# Altium PCB Encoder.PcbDoc
Units mm, origin at the board's own origin, x right, y up, seen from the top; angles counter-clockwise.
Board outline 39.12 x 39.12 mm, 4 copper layers (Top Layer, Signal Layer 2, Signal Layer 1, Bottom Layer), stack 0.778 mm thick; 30 components, 28 nets, 133 pads, 38 vias.
Unrouted connection lines stored in the file: 10.
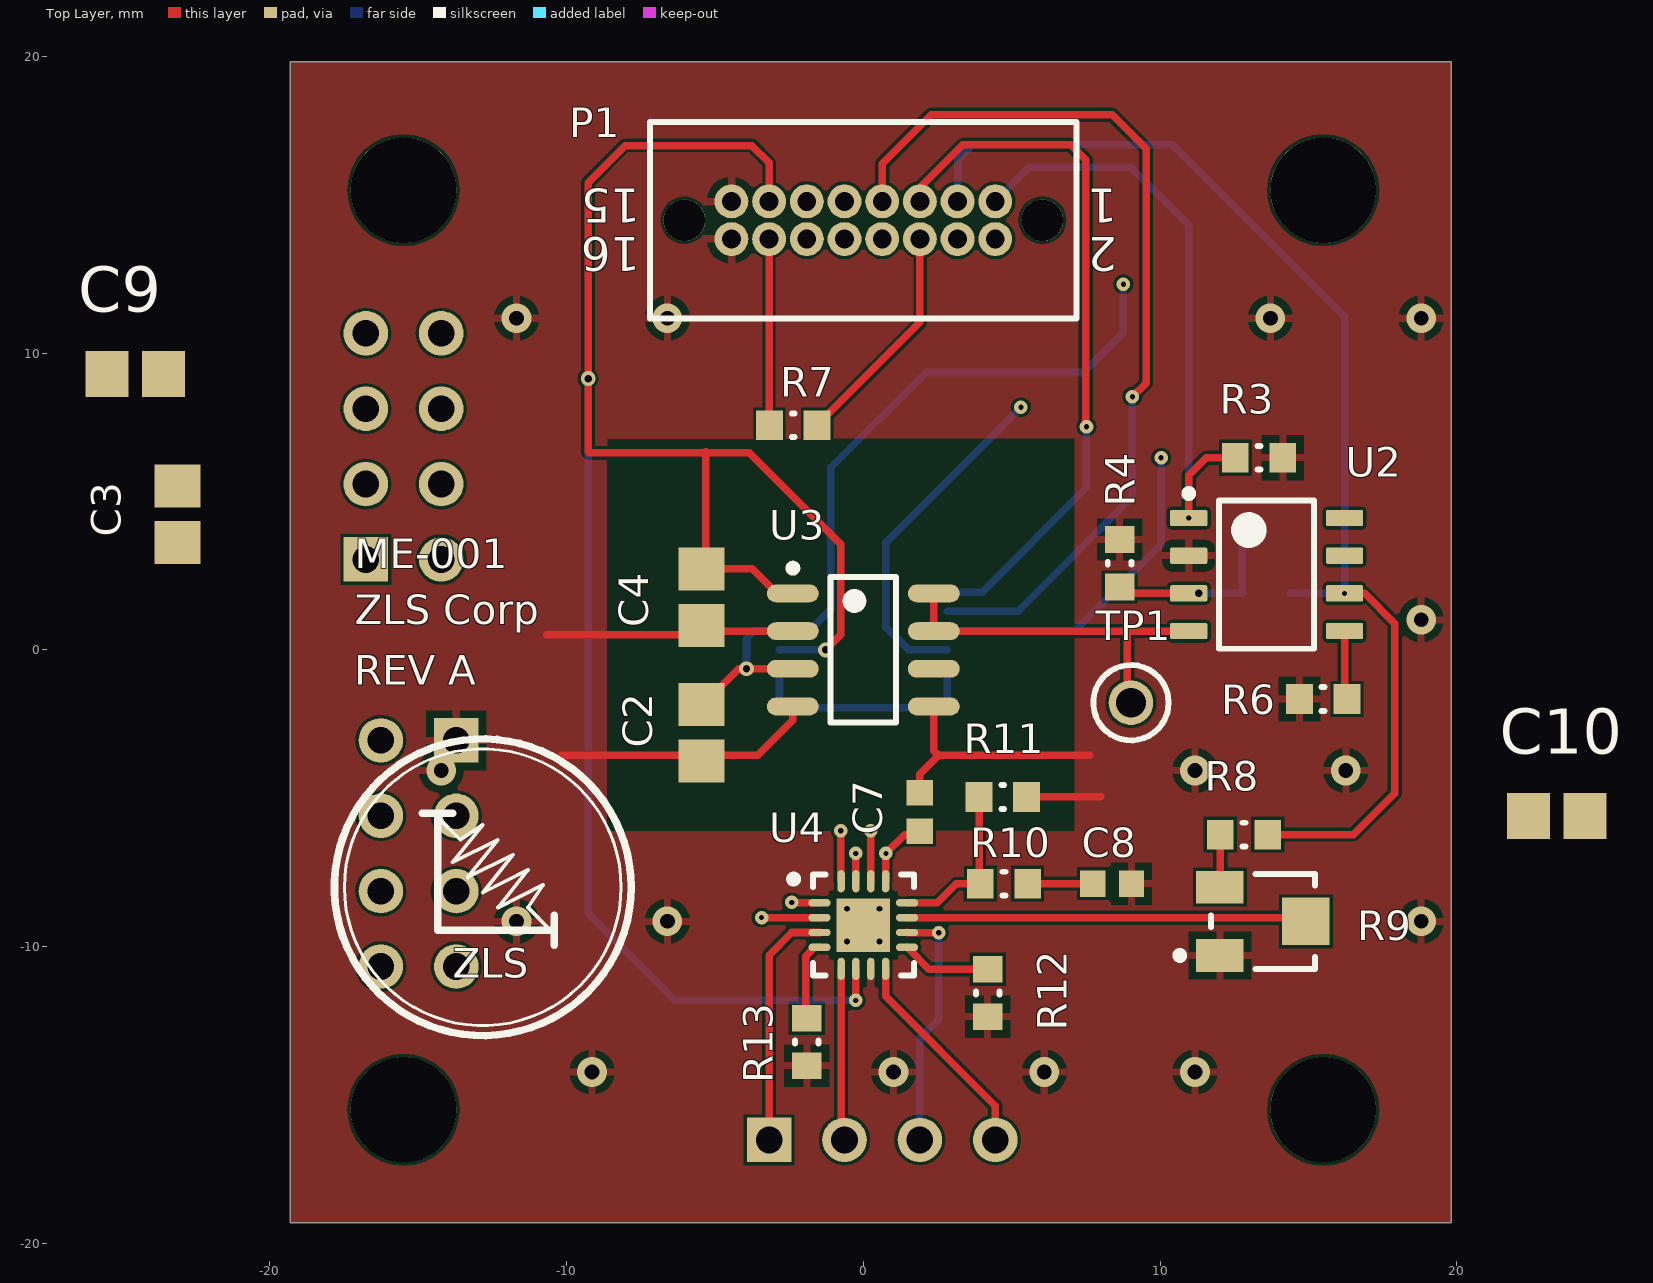
[diagram p0: Top Layer view]
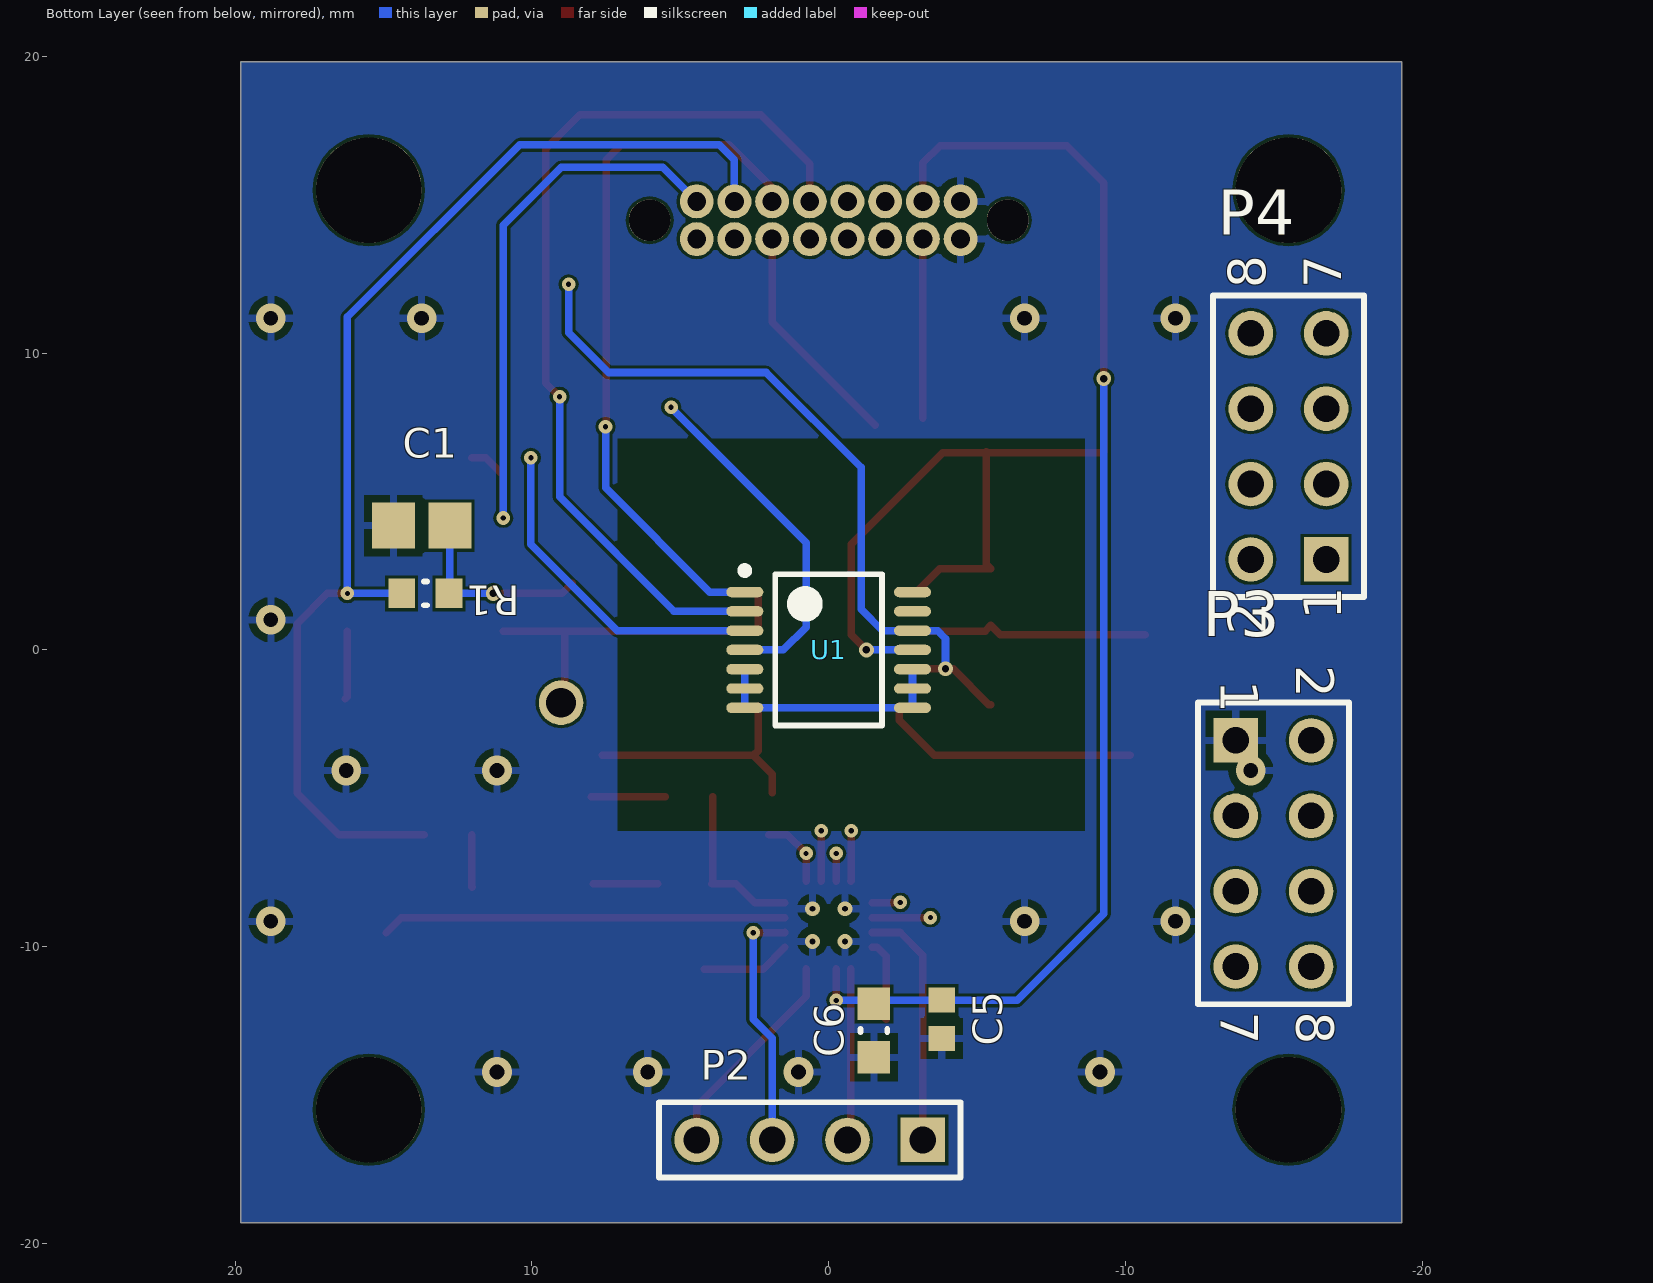
[diagram p1: Bottom Layer view, seen from below]
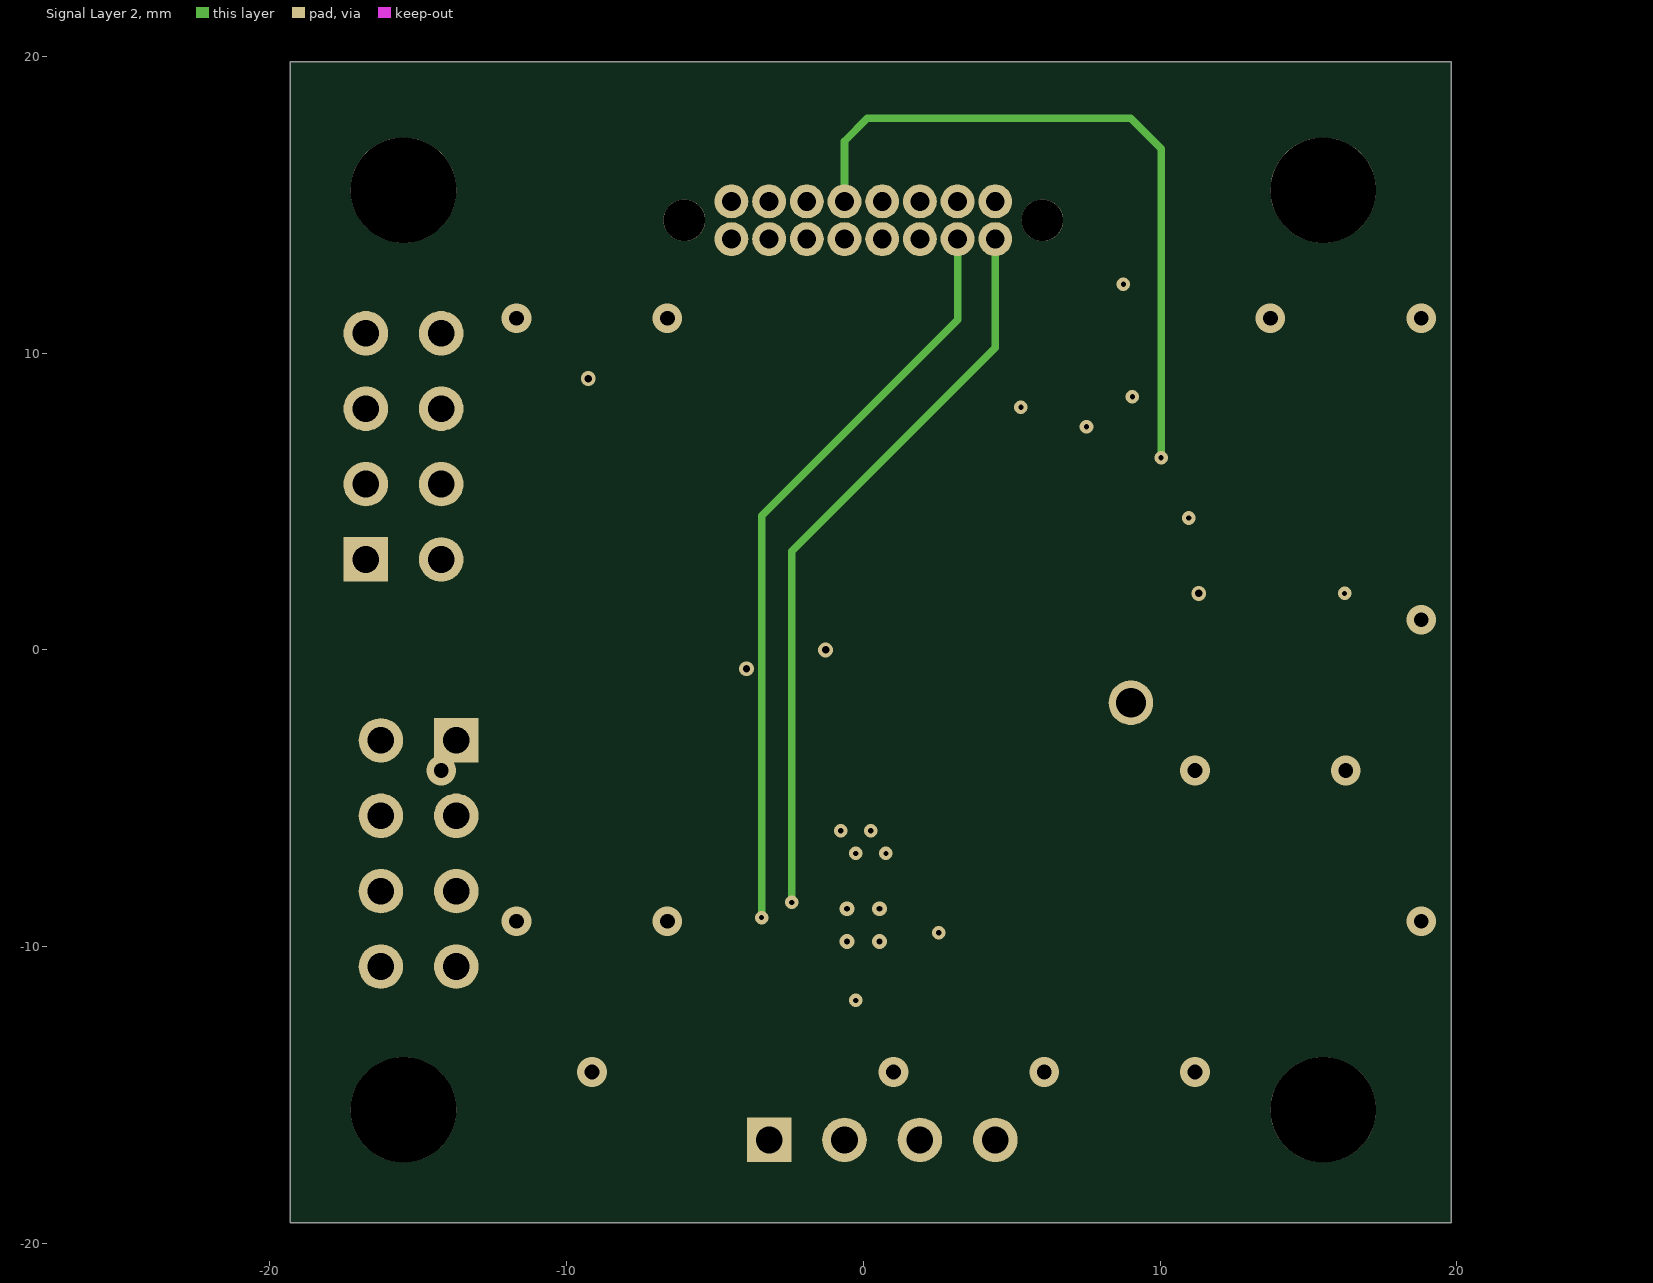
[diagram p2: Signal Layer 2]
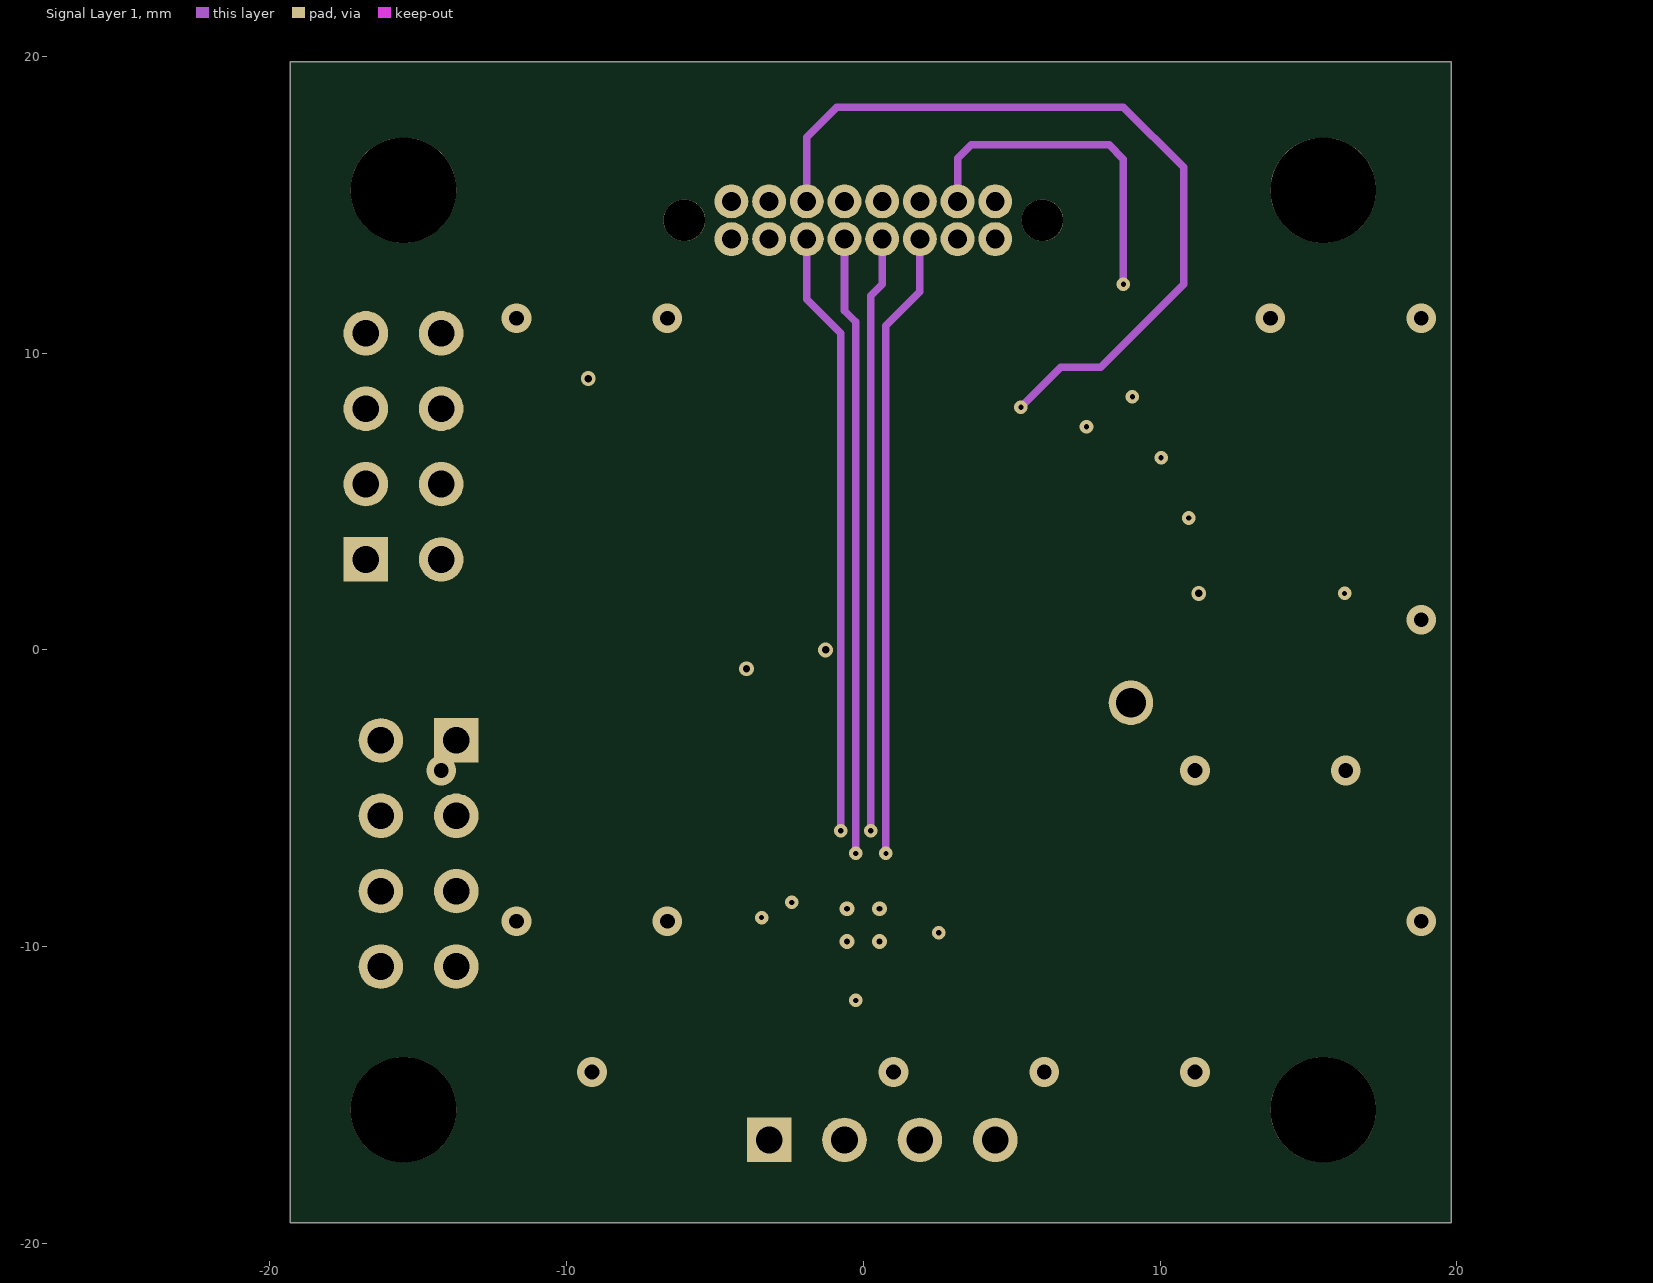
[diagram p3: Signal Layer 1]

## Layer stack, top to bottom
Top Solder: solder mask 0.0102, Solder Resist, Dk 3.5
Top Layer: signal copper 0.0356
Dielectric 1: core 0.254, FR-4, Dk 4.2
Signal Layer 2: signal copper 0.036
Dielectric 3: prepreg 0.127, Dk 4.2
Signal Layer 1: signal copper 0.036
Dielectric 2: core 0.254, Dk 4.2
Bottom Layer: signal copper 0.0356
Bottom Solder: solder mask 0.0102, Solder Resist, Dk 3.5

## Board outline
-19.304,-19.304 19.812,-19.304 19.812,19.812 -19.304,19.812

## Design rules (kind name [scope] priority, off if disabled: settings)
Clearance [All] p1: gap=0.1 ignorepadtopadclearanceinfootprint=FALSE except(0: Arc-Hole Track-Hole SMDPad-Hole THPad-Hole Via-Hole Fill-Hole Poly-Hole Region-Hole Text-Hole; 0.2: Arc-Arc Arc-Track Arc-Text Track-Track Track-Text SMDPad-Text THPad-Text Via-Text Fill-Text Poly-Text Region-Text Text-Text)
PolygonConnect [All] p1: connectstyle=Relief reliefconductorwidth=0.254 reliefentries=4 polygonreliefangle="90 Angle" airgapwidth=0.254
RoutingVias [All] p1: holewidth=0.711 width=1.27 viastyle="Through Hole" minholewidth=0.711 minwidth=1.27 maxholewidth=0.711 maxwidth=1.27
SolderMaskExpansion [All] p1: expansion=0.102
Width [All] p1: maxlimit=0.254 minlimit=0.254 preferedwidth=0.254
30 further rules are at their usual default settings.

## Classes and differential pairs
component class Motor: C5 C6 C7 C8 P2 R7 R8 R9 R10 R11 R12 R13 U4
component class Encoders: C1 C2 C3 C4 C9 C10 P1 P3 P4 R1 R3 R4 R6 TP1 U1 U2 U3

## Components (designator, comment, footprint, x,y, rotation, side; value= is the part's Value field where it differs from the comment)
C1 "VJ0805Y104KXXCW1BC" CAPC2013X135X50ML15T20 13.716,4.191 r180 bottom
C2 "1uF" CAPC2013X135X50ML15T20 -5.461,-2.794 r90 top
C3 "10uF" CAPC2013X135X50ML15T20 -23.114,4.572 r90 top
C4 "1uF" CAPC2013X135X50ML15T20 -5.461,1.778 r90 top
C5 "0.1uF" CAPC1608X94X35LL15T15 -3.81,-12.446 r270 bottom
C6 "4.7uF" CAPC0603(1608)55_M -1.524,-12.827 r90 bottom
C7 "0.1uF" CAPC1608X94X35LL15T15 1.905,-5.461 r270 top
C8 "22nF" CAPC1608X94X35LL15T15 8.382,-7.874 r0 top
C9 "VJ0805Y104KXXCW1BC" CAPC2013X135X50ML15T20 -24.536,9.296 r0 top
C10 "1uF" CAPC2013X135X50ML15T20 23.368,-5.588 r0 top
P1 "SAMTEC-TFM-108-01-X-D-AJ" SAMTEC-TFM-108-01-X-D-A 0,14.478 r180 top locked
P2 "Header 4" HDR1X4 -3.175,-16.51 r0 bottom
P3 "Header 4X2" HDR2X4 -13.716,-3.048 r270 bottom
P4 "Header 4X2" HDR2X4 -16.764,3.048 r90 bottom
R1 "10k" RESC0603(1608)_N 13.589,1.905 r0 bottom
R3 "10K" RESC0603(1608)_N 13.335,6.477 r180 top value="1020.00 Ohm"
R4 "100k" RESC0603(1608)_N 8.636,2.921 r270 top
R6 "0.1" RESC0603(1608)_N 15.494,-1.651 r0 top value="1020.00 Ohm"
R7 "0.1" RESC0603(1608)_N -2.362,7.569 r180 top value="1020.00 Ohm"
R8 "0.1" RESC0603(1608)_N 12.827,-6.223 r0 top value="1020.00 Ohm"
R9 "3313J-1-503E" BOUR-3313J-1_V 13.462,-9.144 r0 top
R10 "1k" RESC0603(1608)_N 4.737,-7.874 r180 top value="1020.00 Ohm"
R11 "10k" RESC0603(1608)_N 4.699,-4.953 r180 top value="1020.00 Ohm"
R12 ".2" RESC0603(1608)_N 4.191,-11.557 r90 top value="1020.00 Ohm"
R13 ".2" RESC0603(1608)_N -1.905,-13.208 r90 top value="1020.00 Ohm"
TP1 "5003" KSTN-5003 9.017,-1.778 r0 top
U1 "AS5048A-HTSP" AMS-TSSOP-14-5000X4400DE_L 0,0 r180 bottom locked
U2 "LTC6752HSC6-1TRMPBF" D0008A_L 13.589,2.54 r0 top
U3 "AS5162-HSOP" AMS-SOIC-8-4900X3900DE_L 0,0 r0 top locked
U4 "STSPIN220" STSPIN220-QFN127P600-8N 0,-9.271 r0 top

## Footprints (in the part's own frame and the unit in brackets; to place one, negate y for a bottom-side part, rotate by r counter-clockwise, add the part's x,y. Pads: shape width x height; smd on the part's side, far side on the other; paste and mask are expansions set on the pad)
AMS-SOIC-8-4900X3900DE_L [mm] "SOIC, 8-Leads, Body 4.9x3.9mm, Pitch 1.27mm, IPC High Density"
  oval 1.75x0.6 smd: 1(-2.375,1.905) 2(-2.375,0.635) 3(-2.375,-0.635) 4(-2.375,-1.905) 5(2.375,-1.905) 6(2.375,-0.635) 7(2.375,0.635) 8(2.375,1.905)
  silkscreen extent -2.5,-2.45 1.1,2.88, body extent -1.95,-2.45 1.95,2.45, height 1.75
AMS-TSSOP-14-5000X4400DE_L [mm] "TSOP, 14-Leads, Body 5.00x4.40mm, Pitch 0.65mm, IPC High Density"
  oval 1.25x0.35 smd: 1(-2.825,1.95) 2(-2.825,1.3) 3(-2.825,0.65) 4(-2.825,0) 5(-2.825,-0.65) 6(-2.825,-1.3) 7(-2.825,-1.95) 8(2.825,-1.95) 9(2.825,-1.3) 10(2.825,-0.65) 11(2.825,0) 12(2.825,0.65) 13(2.825,1.3) 14(2.825,1.95)
  silkscreen extent -2.95,-2.55 1.8,2.8, body extent -2.25,-2.55 2.25,2.55, height 1.2
BOUR-3313J-1_V [mm] "SMD, 3-Leads, Body 3.5x3.2mm, Pitch 1.15mm"
  rect 1.6x1.1 smd paste+0: 1(-1.45,-1.15) 3(-1.45,1.15)
  rect 1.6x1.6 smd paste+0: 2(1.45,0)
  silkscreen extent -2.92,-1.6 1.75,1.6, body extent -1.75,-1.65 1.75,1.65, height 2.11
CAPC0603(1608)55_M [mm] "Chip Capacitor, Body 1.6x0.8mm, Height 0.55mm, IPC Low Density"
  rect 1.1x1.1 smd: 1(-0.9,0) 2(0.9,0)
  silkscreen extent -0.05,-0.45 0.05,0.45, body extent -0.87,-0.47 0.88,0.48, height 0.55
CAPC1608X94X35LL15T15 [mm]
  rect 0.85x0.9 smd: 1(-0.65,0) 2(0.65,0)
  body extent -0.88,-0.48 0.87,0.48, height 0.94
CAPC2013X135X50ML15T20 [mm] "Chip Capacitor, 2-Leads, Body 2.00x1.25mm, IPC Low Density"
  rect 1.45x1.55 smd: 1(-0.95,0) 2(0.95,0)
  body extent -1.08,-0.7 1.07,0.7, height 1.35
D0008A_L [mm] "SOIC, 8-Leads, Body 5x4mm, Pitch 1.27mm, IPC High Density"
  rrect18% 1.25x0.55 smd: 1(-2.625,1.905) 2(-2.625,0.635) 3(-2.625,-0.635) 4(-2.625,-1.905) 5(2.625,-1.905) 6(2.625,-0.635) 7(2.625,0.635) 8(2.625,1.905)
  silkscreen extent -2.75,-2.5 1.6,2.85, body extent -3,-2.45 3,2.45, height 1.63
HDR1X4 [mm] "Connector; Header; 4 Position"
  rect 1.5x1.5 hole 0.9: 1(0,0)
  round 1.5 hole 0.9: 2(2.54,0) 3(5.08,0) 4(7.62,0)
  silkscreen extent -1.27,-1.27 8.89,1.27
HDR2X4 [mm] "Connector; Header; 4x2 Position"
  rect 1.5x1.5 hole 0.9: 1(0,0)
  round 1.5 hole 0.9: 2(0,2.54) 3(2.54,0) 4(2.54,2.54) 5(5.08,0) 6(5.08,2.54) 7(7.62,0) 8(7.62,2.54)
  silkscreen extent -1.27,-1.27 8.89,3.81
KSTN-5003 [mm] "Test Point, Through Hole, Dia 2.54mm"
  round 1.5 hole 1: 1(0,0)
  silkscreen extent -1.27,-1.27 1.27,1.27, body extent -1.27,-1.27 1.27,1.27, height 4.57
RESC0603(1608)_N [mm] "Chip Resistor, Body 1.6x0.8mm, IPC Medium Density"
  rect 0.9x1 smd: 1(-0.8,0) 2(0.8,0)
  silkscreen extent -0.05,-0.4 0.05,0.4, body extent -0.85,-0.47 0.85,0.47, height 0.6
SAMTEC-TFM-108-01-X-D-A [mil]
  round 45 hole 25: 1(-175,-25) 2(-175,25) 3(-125,-25) 4(-125,25) 5(-75,-25) 6(-75,25) 7(-25,-25) 8(-25,25) 9(25,-25) 10(25,25) 11(75,-25) 12(75,25) 13(125,-25) 14(125,25) 15(175,-25) 16(175,25)
  round 55.12 hole 55.12: MH1(-237.48,0) MH2(237.48,0)
  silkscreen extent -283,-130 283,130, body extent -262,-112 263,113, height 220
STSPIN220-QFN127P600-8N [mm]
  oval 0.75x0.25 smd: 1(-1.475,0.75) 2(-1.475,0.25) 3(-1.475,-0.25) 4(-1.475,-0.75) 9(1.475,-0.75) 10(1.475,-0.25) 11(1.475,0.25) 12(1.475,0.75)
  oval 0.25x0.75 smd: 5(-0.75,-1.475) 6(-0.25,-1.475) 7(0.25,-1.475) 8(0.75,-1.475) 13(0.75,1.475) 14(0.25,1.475) 15(-0.25,1.475) 16(-0.75,1.475)
  rect 1.8x1.8 smd: 17(0,0)
  silkscreen extent -2.47,-1.7 1.7,1.7, body extent -1.6,-1.6 1.6,1.6, height 1

## Part data
C1 C9: library part CMP-2007-03442-1, "0.1µF ±10% 25V Ceramic Capacitor X7R 0805 (2012 Metric)", Capacitance=100nF, Case/Package=0805, Case Code (Metric)=2012, Dielectric=X7R, Dielectric Material=Tantalum, Manufacturer=Vitramon, Max Operating Temperature=125°C, Min Operating Temperature=-55°C, Package Quantity=4000, Supplier Part Number 1=720-1537-1-ND, Tolerance=10%, Voltage Rating=25V, Case Code (Imperial)=0805, ComponentLink1Description=https://datasheet.ciiva.com/11491/vjw1bcbascomseries-11491758.pdf?src-supplier=Avnet, ComponentLink1URL=https://datasheet.ciiva.com/11491/vjw1bcbascomseries-11491758.pdf?src-supplier=Avnet, ComponentLink2Description=https://datasheet.ciiva.com/176/vjw1bcbascomseries-176875.pdf?src-supplier=Digi-Key, ComponentLink2URL=https://datasheet.ciiva.com/176/vjw1bcbascomseries-176875.pdf?src-supplier=Digi-Key, Depth=1.25mm, Height=1.45mm, Lead Free="Lead Free", Length=2mm, Manufacturer Part Number=VJ0805Y104KXXCW1BC, Mount="Surface Mount", Number of Pins=2, Packaging="Tape and Reel", Part Number=VJ0805Y104KXXCW1BC, Pricing 1="1=0.26000, 10=0.17900, 100=0.10120, 500=0.07142, 1000=0.06250 (USD)", RoHS=Yes, Stock 1=72674, Supplier 1=Digi-Key, Termination=SMD/SMT, Thickness=0.037inch, Voltage Rating (DC)=25V, Weight=0.000194oz, Width=1.25mm
C2 C3 C4 C10: library part CMP-2007-03442-1, "0.1µF ±10% 25V Ceramic Capacitor X7R 0805 (2012 Metric)"
C5 C7 C8: library part CMP-1661-00001-2, "CAP .1UF 16V CERAMIC X7R 0603", Capacitance=1uF, Case/Package=0603, Case Code (Metric)=1608, Dielectric=X7R, Manufacturer=Yageo, Manufacturer Part Number=CC0603KRX7R7BB105, Max Operating Temperature=125°C, Min Operating Temperature=-55°C, Package Quantity=1, Supplier Part Number 1=311-1446-6-ND, Tolerance=10%, Voltage=16V, Case Code (Imperial)=0603, ComponentLink1Description=Datasheet, ComponentLink1URL=http://datasheets.avx.com/X7RDielectric.pdf, ComponentLink2Description=http://www.yageo.com/documents/recent/UPY-GPHC_X7R_6.3V-to-50V_18.pdf, ComponentLink2URL=http://www.yageo.com/documents/recent/UPY-GPHC_X7R_6.3V-to-50V_18.pdf, ComponentLink3Description=http://www.yageo.com/documents/recent/UPY-GPHC_X7R_6.3V-to-50V_8.pdf, ComponentLink3URL=http://www.yageo.com/documents/recent/UPY-GPHC_X7R_6.3V-to-50V_8.pdf, ComponentLink4Description=http://www.farnell.com/datasheets/1734573.pdf, ComponentLink4URL=http://www.farnell.com/datasheets/1734573.pdf, ComponentLink5Description=http://www.farnell.com/datasheets/1489800.pdf, ComponentLink5URL=http://www.farnell.com/datasheets/1489800.pdf, Composition=Ceramic, Depth=0.8mm, Dissipation Factor=5%, Halogen Free="Halogen Free", Height=0.8mm, Lead Free="Lead Free", Length=1.6mm, Mount="Surface Mount", Number of Pins=2, Packaging="Tape and Reel", Pricing 1="1=0.21, 10=0.143, 100=0.0727, 500=0.04974, 1000=0.044 (USD)", Radiation Hardening=No, REACH SVHC=Unknown, Stock 1=5506121, Supplier 1=Digi-Key, Termination=SMD/SMT, Thickness=0.035inch, Voltage Rating=16V, Voltage Rating (DC)=16V, Width=0.031inch
C6: library part CMP-1035-02779-1, "CAP 4.7uF 6.3V ±10% 0603 (1608 Metric) Thickness 0.55mm SMD", Case-EIA=0603, Case-Metric=1608, Dielectric=X5R, Dielectric Material=Ceramic, Manufacturer=KEMET, Manufacturer Part Number=C0603C475K9PACTU, Max Operating Temperature=85°C, Min Operating Temperature=-55°C, Package Quantity=1, Rated Voltage="6.3 V", Supplier Part Number 1=399-3482-6-ND, Tolerance=±10%, Voltage=6.3V, Capacitance=4.7uF, Case/Package=0603, Case Code (Imperial)=0603, Case Code (Metric)=1608, ComponentLink1Description=https://api.kemet.com/component-edge/download/datasheet/C0603C475K9PACTU.pdf, ComponentLink1URL=https://api.kemet.com/component-edge/download/datasheet/C0603C475K9PACTU.pdf, ComponentLink2Description=http://www.farnell.com/datasheets/1732700.pdf, ComponentLink2URL=http://www.farnell.com/datasheets/1732700.pdf, ComponentLink3Description=http://www.farnell.com/datasheets/1789732.pdf, ComponentLink3URL=http://www.farnell.com/datasheets/1789732.pdf, ComponentLink4Description=http://www.farnell.com/datasheets/40889.pdf, ComponentLink4URL=http://www.farnell.com/datasheets/40889.pdf, Contact Plating=Matte,Tin, Depth=0.8mm, Dissipation Factor=5%, Height=0.8mm, Lead Free="Lead Free", Lead Pitch=0.7mm, Length=1.6mm, Max Thickness="0.55 mm", Mount="PCB,Surface Mount", Number of Pins=2, Packaging="Tape and Reel", Pricing 1="1=0.21, 10=0.15, 100=0.0706, 500=0.04952, 1000=0.041 (USD)", Radiation Hardening=No, REACH SVHC="No SVHC", Stock 1=1765509, Supplier 1=Digi-Key, Technology=SMT, Termination=SMD/SMT, Thickness=0.035inch, Voltage Rating=6.3V, Voltage Rating (DC)=6.3V, Width=0.031inch
P2: "Header, 4-Pin", LatestRevisionDate=17-Jul-2002, LatestRevisionNote="Re-released for DXP Platform.", Publisher="Altium Limited"
P3 P4: "Header, 4-Pin, Dual row", LatestRevisionDate=17-Jul-2002, LatestRevisionNote="Re-released for DXP Platform.", Publisher="Altium Limited"
R1 R4: library part CMP-1012-00511-1, "0R12 0.1W 1% 0603 (1608 Metric)  SMD"
R3 R6 R7 R8 R10 R11 R12 R13: library part CMP-1012-00511-1, "0R12 0.1W 1% 0603 (1608 Metric)  SMD", Case-EIA=0603, Case-Metric=1608, Manufacturer=Vishay, Manufacturer Part Number=CRCW060310K0FKEA, Max Operating Temperature=155°C, Max Power Dissipation=100mW, Min Operating Temperature=-55°C, Package Quantity=10, Power="0.1 W", Resistance=10kR, Supplier Part Number 1=311-0.0GRDKR-ND, Temperature Coefficient=100ppm/°C, Tolerance="1 %", Voltage Rating=75V, Case/Package=0603, Case Code (Imperial)=0603, Case Code (Metric)=1608, ComponentLink1Description=http://www.vishay.com/docs/20008/dcrcw.pdf, ComponentLink1URL=http://www.vishay.com/docs/20008/dcrcw.pdf, ComponentLink2Description=https://www.verical.com/server-webapp/html/getDatasheet?partID=86831, ComponentLink2URL=https://www.verical.com/server-webapp/html/getDatasheet?partID=86831, ComponentLink3Description=http://www.farnell.com/datasheets/2310790.pdf, ComponentLink3URL=http://www.farnell.com/datasheets/2310790.pdf, ComponentLink4Description=http://www.vishay.com/docs/20035/dcrcwe3.pdf, ComponentLink4URL=http://www.vishay.com/docs/20035/dcrcwe3.pdf, ComponentLink5Description=http://www.farnell.com/datasheets/2111203.pdf, ComponentLink5URL=http://www.farnell.com/datasheets/2111203.pdf, ComponentLink6Description=http://uk.rs-online.com/webdocs/0d98/0900766b80d98afc.pdf, ComponentLink6URL=http://uk.rs-online.com/webdocs/0d98/0900766b80d98afc.pdf, Composition="Thick Film", Contact Plating=Lead,Tin, Depth=0.85mm, Features="Automotive AEC-Q200", Height=0.45mm, Lead Free="Lead Free", Length=1.55mm, Military Standard=Not, Number of Pins=2, Number of Terminations=2, Packaging="Tape and Reel", Power Rating=100mW, Pricing 1="1=0.1, 10=0.021, 25=0.0152, 50=0.0114, 100=0.0084, 250=0.00644, 500=0.00514, 1000=0.00379 (USD)", Radiation Hardening=No, REACH SVHC=Unknown, Stock 1=49641653, Supplier 1=Digi-Key, Technology=SMT, Termination=SMD/SMT, Voltage Rating (DC)=75V, Weight=7.1E-05oz, Width=0.033inch
R9: library part CMP-2000-05588-1, "3 mm Trimpot(R) Trimming Potentiometer, 50 KOhm, +/- 20%, 0.125 W, -55 to 125 degC, 3-Pin SMD, RoHS, Tape and Reel", Manufacturer=Bourns, Package Description="3-Pin Surface Mount Device, Body 3.5 x 3.2 mm, Pitch 1.15 mm", Package Reference=3313J-1, Power Rating=125mW, Resistance Tolerance=±20%, Temperature Coefficient=±150ppm/°C, Track Resistance=50kohm, Datasheet URL=http://www.bourns.com/docs/Product-Datasheets/3313.pdf, Datasheet Version=05/2016, Manufacturer URL=http://www.bourns.com/, Mounting Technology=SurfaceMount, No. of Turns=1, Potentiometer Mounting=SMD, SVHC=NoSVHC(19-Dec-2012)
TP1: library part CMP-1672-00009-1, "Test Point, Orange, 1-Pin THD, RoHS", Forward Current="3 A", Forward Voltage="1.08 V", Max Operating Temperature="150 degC", Max Surge Current="80 A", Min Operating Temperature="-65 degC", Package Quantity=500, Peak Reverse Current="600 uA", ComponentLink1Description="Manufacturer URL", ComponentLink1URL=http://www.keyelco.com/, ComponentLink2Description=Datasheet, ComponentLink2URL=http://keyelco.com/userAssets/file/M65p56.pdf, DatasheetVersion=Jun-15, Diameter="5.3 mm", Height="0.25 inch", Length="9.5 mm", Mount="Through Hole", PackageDescription="1-Pin Through Hole Device, Dia 2.54 mm", PackageReference=5003, Packaging=Bulk, Pins=2, Radiation Hardening=No, REACH SVHC="No SVHC", RoHSCompliant=true, Weight="0.01 lb", Width="0.25 inch"
U1: library part CMP-0555-00034-2, "Magnetic Rotary Encoder 14-bit Angular Position Sensor, 3.3 or 5 V, TSSOP-14, Pb-Free, Reel", Manufacturer=AMS, Supply Voltage (V)="3.3 or 5.0", Code_JEDEC=MO-153, ComponentLink1Description="Manufacturer URL", ComponentLink1URL=www.ams.com, ComponentLink2Description=Datasheet, ComponentLink2URL=http://www.ams.com/eng/content/download/438523/1341157/143015, DatasheetVersion="Rev. 1.3", Features="SPI, PWM, In System Programmable", Mounting Technology="Surface Mount", Output="SPI, PWM", PackageDescription="14-Pin Small Outline Package, 5 x 4.4 mm Body, 0.65 mm Pitch", PackageReference=TSSOP-14, PackageVersion="Rev. 2.7, 10/2010", PartNumber=AS5048A-HTSP, Resolution=14-bit
U2: "IC COMP R-R CMOS 280MHZ SC70-6"
U3: library part CMP-0555-00008-2, "12-Bit Magnetic Angle Position Sensor, 4.5 to 5.5 V, SOIC-8, Pb-Free, Reel", Manufacturer=AMS, Code_JEDEC=MS-012, ComponentLink1Description="Manufacturer URL", ComponentLink1URL=www.ams.com, ComponentLink2Description=Datasheet, ComponentLink2URL=http://www.ams.com/eng/content/download/326803/1143657/185575, DatasheetVersion="Rev. 1.3", Mounting Technology="Surface Mount", PackageDescription="8-Pin Small Outline Integrated Circuit, 4.9 x 3.9 mm Body, 1.27 mm Pitch", PackageReference=SOIC-8, PackageVersion="N/C, 09/2010", Packing=Reel, PartNumber=AS5162-HSOP

## Free pads (board coordinates)
  round 3.556 hole 3.556: ""(-15.494,-15.494) ""(-15.494,15.494) ""(15.494,-15.494) ""(15.494,15.494)

## Via types
v1: diameter 1/1/1/1 (per signal layer), hole 0.5, Top Layer to Bottom Layer, 15 vias
v2: diameter 0.457, hole 0.178, Top Layer to Bottom Layer, 15 vias
v3: diameter 0.5, hole 0.25, Top Layer to Bottom Layer, 4 vias
v4: diameter 0.5, hole 0.2, Top Layer to Bottom Layer, 4 vias

## Nets (pads, with @x,y where several pads share a name; then routed paths per layer and width w, separated by ;. In a path a pad name is that pad's centre, name@x,y a point inside that pad or via, vN(x,y) a via of type N, cw(c..) or ccw(c..) an arc to the next point about the centre after c; other vN are vias at no path point)
+3.3: C2.2 C3.2 P1.3 R1.2 R8.2 U1.12 U2.6 U3.3 | length 78.5
  Top Layer w0.254: C2.2 -5.4,-1.844 -4.191,-0.635 v3(-3.937,-0.635) U3.3 ; R8.2 16.51,-6.223 17.907,-4.826 17.907,0.889 16.891,1.905 v2(16.214,1.905)
  Signal Layer 1 w0.254: P1.3 3.175,16.561 3.632,17.018 8.28,17.018 8.763,16.535 v2(8.763,12.319)
  Bottom Layer w0.254: v3(-3.937,-0.635) -3.937,0.381 -3.668,0.65 U1.12 -1.814,0.65 -1.092,1.372 -1.092,6.147 2.108,9.347 7.417,9.347 8.763,10.693 v2(8.763,12.319) ; P1.3 3.175,16.51 3.683,17.018 10.414,17.018 16.214,11.218 v2(16.214,1.905) R1.2
+5: C4.2 C5.1 C6.2 C9.2 C10.2 P1.13 P3.3 U1.11 U3.1 U4.6 | length 69.1
  Top Layer w0.254: -5.309,6.68 -5.309,2.88 C4.2 -3.744,2.728 -2.921,1.905 U3.1 ; P1.13 -3.175,16.408 -3.759,16.993 -8.026,16.993 -9.271,15.748 v3(-9.271,9.144) -9.271,6.665 -9.248,6.642 -3.848,6.642 -0.762,3.556 -0.762,0.508 v3(-1.27,0) ; v2(-0.254,-11.811) -0.25,-11.807 U4.6
  Bottom Layer w0.254: v3(-9.271,9.144) -9.271,-8.89 -6.35,-11.811 v2(-0.254,-11.811) ; U1.11 v3(-1.27,0)
CS: P1.5 U1.1 | length 24.1
  Top Layer w0.254: P1.5 1.905,15.57 3.353,17.018 6.985,17.018 7.493,16.51 7.493,7.544 v2(7.518,7.518)
  Bottom Layer w0.254: U1.1 4.007,1.95 7.518,5.461 v2(7.518,7.518)
GND: C1.1 C2.1 C3.1 C4.1 C5.2 C6.1 C7.1 C8.2 C9.1 C10.1 P1.15 P1.16 P3.1 R3.1 R4.1 R6.1 R9.1 R11.1 R12.1 R13.1 U1.5 U1.6 U1.7 U1.8 U1.9 U1.10 U1.13 U2.2 U3.2 U3.4 U3.5 U4.7 U4.17 | length 36.3
  Top Layer w0.254: -10.668,0.508 -5.781,0.508 C4.1 -5.268,0.635 U3.2 ; -10.16,-3.556 -3.556,-3.556 -2.375,-2.375 U3.4 ; C7.1 1.905,-4.191 2.54,-3.556 ; U3.5 2.375,-3.391 2.54,-3.556 ; R11.1 8.001,-4.953 ; 7.62,-3.556 2.54,-3.556
  Bottom Layer w0.254: U1.10 U1.9 U1.8 U1.7 U1.6 U1.5
  other v1: -9.144,-14.224 1.016,-14.224 6.096,-14.224 11.176,-14.224 -11.684,-9.144 -6.604,-9.144 18.796,-9.144 -14.224,-4.064 11.176,-4.064 16.256,-4.064 18.796,1.016 -11.684,11.176 -6.604,11.176 13.716,11.176 18.796,11.176
  other v4: -0.55,-9.821 0.55,-9.821 -0.55,-8.721 0.55,-8.721
MISO: P1.9 U1.3 | length 35.2
  Signal Layer 2 w0.254: P1.9 -0.635,17.145 0.127,17.907 9.017,17.907 10.033,16.891 v2(10.033,6.477)
  Bottom Layer w0.254: U1.3 7.127,0.65 10.033,3.556 v2(10.033,6.477)
MOSI: P1.11 U1.4 | length 38.7
  Signal Layer 1 w0.254: P1.11 -1.905,17.272 -0.889,18.288 8.763,18.288 10.795,16.256 10.795,12.319 8.001,9.525 6.655,9.525 v2@5.359,8.23
  Bottom Layer w0.254: U1.4 1.524,0 0.762,0.762 0.762,3.607 v2@5.207,8.052
  other v2: 5.309,8.179
NetC1_2: C1.2 R1.1 R4.2 U2.3 | length 6.3
  Top Layer w0.254: R4.2@8.636,2.248 8.979,1.905 U2.3
  Bottom Layer w0.254: v3(11.303,1.905) R1.1 12.766,1.928 C1.2
NetC7_2: C7.2 P1.6 R7.1 U4.13 | length 31.3
  Top Layer w0.254: R7.1 1.905,11.036 P1.6 ; U4.13 0.762,-7.784 v2(0.762,-6.858) 1.397,-6.223 C7.2@2.017,-6.223
  Signal Layer 1 w0.254: v2(0.762,-6.858) 0.762,10.922 1.905,12.065 P1.6
NetC8_1: C8.1 R10.1 | length 2.2
  Top Layer w0.254: R10.1@5.753,-7.874 C8.1@7.926,-7.874
NetP1_2: P1.2 U4.1 | length 26.1
  Top Layer w0.254: v2(-2.413,-8.509) -2.401,-8.521 U4.1
  Signal Layer 2 w0.254: v2(-2.413,-8.509) -2.413,3.327 4.445,10.185 P1.2
NetP1_4: P1.4 U4.2 | length 27.6
  Top Layer w0.254: v2(-3.429,-9.017) -3.425,-9.021 U4.2
  Signal Layer 2 w0.254: v2(-3.429,-9.017) -3.429,4.521 3.175,11.125 P1.4
NetP1_8: P1.8 U4.14 | length 21.8
  Top Layer w0.254: U4.14 0.254,-7.792 v2(0.254,-6.096)
  Signal Layer 1 w0.254: v2(0.254,-6.096) 0.254,11.303 0.254,11.938 0.635,12.319 P1.8
NetP1_10: P1.10 U4.15 | length 21.8
  Top Layer w0.254: v2(-0.254,-6.858) -0.254,-7.792 U4.15
  Signal Layer 1 w0.254: P1.10 -0.635,11.43 -0.254,11.049 v2(-0.254,-6.858)
NetP1_12: P1.12 U4.16 | length 22.1
  Top Layer w0.254: v2(-0.762,-6.096) -0.762,-7.784 U4.16
  Signal Layer 1 w0.254: P1.12 -1.905,11.811 -0.762,10.668 v2(-0.762,-6.096)
NetP1_14: P1.14 R7.2 | length 6
  Top Layer w0.254: R7.2@-3.175,7.81 P1.14
NetR6_2: R6.2 U2.5 | length 2.3
  Top Layer w0.254: U2.5 16.214,-1.571 R6.2
NetR8_1: R8.1 R9.3 | length 1.8
  Top Layer w0.254: R9.3 12.027,-7.979 R8.1
NetR9_2: R9.2 U4.11 | length 13.6
  Top Layer w0.254: U4.11 14.408,-9.021 R9.2@14.912,-9.525
NetR10_2: R10.2 R11.2 U4.12 | length 5.7
  Top Layer w0.254: U4.12 2.49,-8.521 3.137,-7.874 R10.2 3.899,-7.836 R11.2
NetR12_2: R12.2 U4.9 | length 3
  Top Layer w0.254: U4.9 2.211,-10.757 R12.2
NetR13_2: R13.2 U4.4 | length 2.8
  Top Layer w0.254: R13.2 -1.943,-12.446 -1.943,-10.325 -1.639,-10.021 U4.4
OTP: P3.5 TP1.1 U2.4 U3.7 U3.8 | length 12.1
  Top Layer w0.254: U3.8 U3.7 U2.4 ; TP1.1@8.89,-1.651 8.89,0.546
OUT: P1.1 R3.2 U2.1 | length 20.4
  Top Layer w0.254: v2(10.964,4.445) 10.964,5.884 11.557,6.477 12.027,6.477
  Bottom Layer w0.254: P1.1 5.588,16.256 9.017,16.256 10.964,14.309 v2(10.964,4.445)
SCLK: P1.7 U1.2 | length 31.1
  Top Layer w0.254: P1.7 0.635,16.383 2.286,18.034 8.382,18.034 9.525,16.891 9.525,8.992 v2(9.068,8.534)
  Bottom Layer w0.254: U1.2 5.212,1.3 9.068,5.156 v2(9.068,8.534)
SHAFT_OUT1+: P2.1 U4.3 | length 8.2
  Top Layer w0.254: P2.1 -3.175,-10.287 -2.409,-9.521 U4.3
SHAFT_OUT1-: P2.2 U4.5 | length 5.8
  Top Layer w0.254: U4.5 -0.75,-16.395 P2.2
SHAFT_OUT2+: P2.3 U4.10 | length 8.3
  Top Layer w0.254: U4.10 1.479,-9.525 v2(2.54,-9.525)
  Bottom Layer w0.254: P2.3 1.905,-13.081 2.54,-12.446 v2(2.54,-9.525)
SHAFT_OUT2-: P2.4 U4.8 | length 7.3
  Top Layer w0.254: U4.8 0.75,-11.672 4.445,-15.367 P2.4
pads on no net: P1.MH1 P1.MH2 P3.2 P3.4 P3.6 P3.7 P3.8 P4.1 P4.2 P4.3 P4.4 P4.5 P4.6 P4.7 P4.8 U1.14 U2.7 U2.8 U3.6

## Polygon pours and split planes (outlines as drawn)
GND on Bottom Layer "GND_L04_P006" (solid, pour order 6): -19.304,19.812 19.812,19.812 19.812,-19.304 -19.304,-19.304
GND on Top Layer "GND_L01_P000" (solid, pour order 0): -19.304,19.812 19.812,19.812 19.812,-19.304 -19.304,-19.304

## Other copper
Top Layer:
  pour cut-out: -8.636,7.112 -8.636,-6.096 7.112,-6.096 7.112,7.112
Bottom Layer:
  pour cut-out: -8.636,7.112 -8.636,-6.096 7.112,-6.096 7.112,7.112

## Silkscreen, mask and mechanical layers (free items; w line width, h text height)
Top Overlay:
  circle w0.254: c-12.823,-7.995 r5
  circle w0.1: c-12.823,-7.995 r4.663
  lines w0.127: -14.347,-5.633 -13.585,-6.395 -12.823,-5.887 -13.839,-7.157 -12.315,-6.395 -13.331,-7.665 -11.807,-6.903 -12.823,-8.173 -11.299,-7.411 -12.315,-8.681 -10.791,-7.919 -11.299,-8.681 -10.537,-9.443
  lines w0.254: -14.855,-5.506 -13.839,-5.506 ; -14.347,-5.633 -14.347,-9.443 -10.537,-9.443 ; -10.41,-9.951 -10.41,-8.935
  text "ME-001" at -17.145,2.758 h1
  text "ZLS Corp" at -17.145,0.864 h1
  text "REV A" at -17.145,-1.168 h1
  text "ZLS" at -13.839,-11.043 h1

## Text inside footprints (layer, text, board x,y; h text height)
P1: Top Overlay "1" at 8.554,15.926 h1.97 r180; Top Overlay "2" at 8.554,14.3 h1.97 r180; Top Overlay "15" at -7.524,15.926 h1.97 r180; Top Overlay "16" at -7.524,14.3 h1.97 r180; Mechanical 40 "5.715" at 13.551,14.605 h0.39 r180; Mechanical 40 "0.635" at 9.423,18.098 h0.39 r180; Mechanical 40 "1.270" at 11.773,14.605 h0.39 r180; Mechanical 40 "1.270" at 7.074,10.224 h0.39 r180; Mechanical 40 "1.587" at 8.28,11.494 h0.39 r180; Mechanical 40 "13.335" at 0.8,21.526 h0.39 r180; Mechanical 40 "12.065" at 0.8,18.986 h0.39 r180; Mechanical 40 "8.890" at 0.66,9.208 h0.39 r180; Mechanical 16 "1" at 8.554,15.926 h1.97 r180; Mechanical 16 "2" at 8.554,14.3 h1.97 r180; Mechanical 16 "15" at -7.524,15.926 h1.97 r180; Mechanical 16 "16" at -7.524,14.3 h1.97 r180
P3: Bottom Overlay "2" at -15.748,-0.508 h1.27 r90; Bottom Overlay "1" at -13.208,-1.016 h1.27 r90; Bottom Overlay "7" at -13.208,-12.192 h1.27 r90; Bottom Overlay "8" at -15.748,-12.192 h1.27 r90
P4: Bottom Overlay "2" at -14.732,0.508 h1.27 r270; Bottom Overlay "1" at -17.272,1.016 h1.27 r270; Bottom Overlay "7" at -17.272,12.192 h1.27 r270; Bottom Overlay "8" at -14.732,12.192 h1.27 r270